# Altium PCB LedMatrixDisplay.PCBDOC (part 3 of 3)
Units mm, origin at the board's own origin, x right, y up, seen from the top; angles counter-clockwise.
Board outline 305.05 x 54.1 mm, 4 copper layers (Top Layer, POWER, GROUND, Bottom Layer); 103 components, 165 nets, 805 pads, 317 vias.
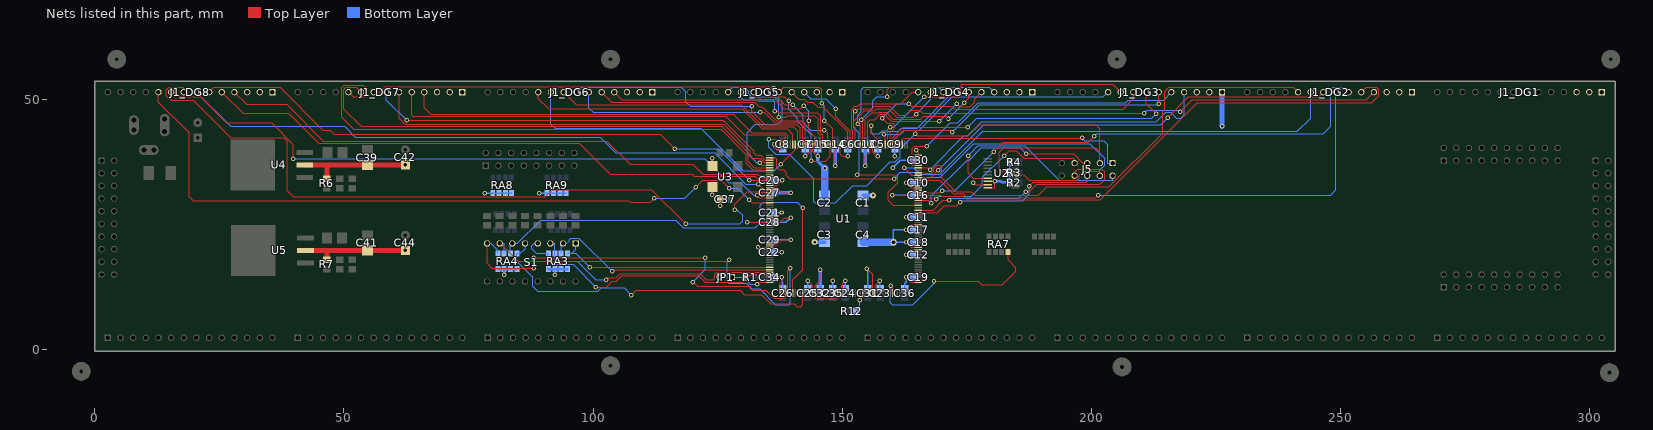
[diagram p5: the nets of this part, all layers, seen from the top]

## Via types
v1: diameter 0.9, hole 0.5, Top Layer to Bottom Layer, 307 vias
v2: diameter 1.2, hole 0.5, Top Layer to Bottom Layer, 9 vias
v3: diameter 1.27, hole 0.711, Top Layer to Bottom Layer, 1 vias

## Nets (pads, with @x,y where several pads share a name; then routed paths per layer and width w, separated by ;. In a path a pad name is that pad's centre, name@x,y a point inside that pad or via, vN(x,y) a via of type N, cw(c..) or ccw(c..) an arc to the next point about the centre after c; other vN are vias at no path point) (continued)
ROWB0: J1_DG2.4 U1.136 | length 141.5
  Top Layer w0.2: v1(152.629,47.752) 153.162,48.285 156.058,48.285 156.464,48.692 159.563,48.692 161.29,46.965 162.879,46.965 163.806,47.892 165.558,47.892 166.104,47.346 v1(210.566,47.346) ; v1(153.035,35.001) 160.757,35.001 161.163,34.595 161.163,33.35 159.258,31.445 159.258,29.863 160.198,28.923 U1.136@165.227,28.923 ; v1(217.805,47.6) 220.218,50.013 255.118,50.013 J1_DG2.4@256.667,51.562
  Bottom Layer w0.2: v1(152.629,47.752) 152.324,47.447 152.324,44.475 153.442,43.358 153.442,35.408 v1(153.035,35.001) ; v1(210.566,47.346) 211.201,47.981 217.424,47.981 v1(217.805,47.6)
ROWB1: J1_DG2.5 U1.140 | length 106.7
  Top Layer w0.2: U1.140@165.227,30.923 169.647,30.923 169.913,30.658 174.244,30.658 174.956,29.947 201.753,29.947 221.26,49.454 256.21,49.454 257.607,50.851 257.607,52.07 257.15,52.527 255.093,52.527 J1_DG2.5@254.127,51.562
ROWB2: J1_DG2.6 U1.141 | length 99.8
  Top Layer w0.2: U1.141@165.227,31.423 169.625,31.423 v1(170.028,31.826) ; v1(180.366,39.624) 182.245,41.504 199.365,41.504 v1(200.533,42.672)
  Bottom Layer w0.2: v1(170.028,31.826) 172.568,31.826 v1(180.366,39.624) ; v1(200.533,42.672) 201.041,43.18 246.482,43.18 248.031,44.729 248.031,52.07 248.463,52.502 250.648,52.502 J1_DG2.6@251.587,51.562
ROWB3: J1_DG2.7 U1.146 | length 105.5
  Top Layer w0.2: U1.146@165.227,33.923 169.545,33.923 172.252,31.217 174.27,31.217 175.083,30.404 200.838,30.404 v1(201.321,30.886)
  Bottom Layer w0.2: v1(201.321,30.886) 247.981,30.886 249.047,31.953 J1_DG2.7@249.047,51.562
ROWB4: J1_DG2.8 U1.147 | length 88.4
  Top Layer w0.2: U1.147@165.227,34.423 167.774,34.423 v1(169.241,35.89) ; v1(215.265,46.457) 219.431,50.622 245.568,50.622 J1_DG2.8@246.507,51.562
  Bottom Layer w0.2: v1(169.241,35.89) 178.385,45.034 213.843,45.034 v1(215.265,46.457)
ROWB5: J1_DG2.9 U1.148 | length 95.4
  Top Layer w0.2: v1(162.433,36.449) 163.959,34.923 U1.148@165.227,34.923
  Bottom Layer w0.2: v1(162.433,36.449) 164.338,36.449 165.735,35.052 169.545,35.052 178.181,43.688 241.3,43.688 243.967,46.355 J1_DG2.9@243.967,51.562
ROWB6: J1_DG2.10 U1.149 | length 94.9
  Top Layer w0.2: U1.149@165.227,35.423 166.675,35.423 166.843,35.255 167.92,35.255 168.377,35.712 168.377,36.22 169.012,36.855 169.545,36.855 170.003,36.398 170.003,34.366 172.746,31.623 175.895,31.623 176.683,30.836 189.307,30.836 191.059,32.588 203.505,32.588 214.249,43.332 214.249,47.752 214.681,48.184 214.681,51.664 215.545,52.527 240.462,52.527 J1_DG2.10@241.427,51.562
ROWC0: J1_DG4.4 U1.169 | length 35.1
  Top Layer w0.2: v1(155.829,44.856) 155.829,43.346 157.077,42.098 U1.169@157.077,41.073
  Bottom Layer w0.2: v1(155.829,44.856) 155.829,43.536 156.109,43.256 157.404,43.256 157.988,43.84 158.801,43.84 158.877,43.764 161.265,43.764 161.875,44.374 164.999,44.374 171.908,51.283 171.908,52.07 172.339,52.502 179.528,52.502 J1_DG4.4@180.467,51.562
ROWC1: J1_DG4.5 U1.173 | length 31.8
  Top Layer w0.2: U1.173@155.077,41.073 155.077,45.568 155.585,46.076 156.553,46.076 157.569,47.092 158.459,47.092 159.805,45.745 v1(169.469,45.745) ; v1(172.974,49.251) 173.584,48.641 175.641,48.641 176.53,49.53 176.53,50.165 J1_DG4.5@177.927,51.562
  Bottom Layer w0.2: v1(169.469,45.745) v1(172.974,49.251)
ROWC2: J1_DG4.6 U1.174 | length 30.3
  Top Layer w0.2: U1.174@154.577,41.073 154.577,45.306 154.661,45.39 154.661,46.203 155.931,47.473 157.252,47.473 157.277,47.498 158.801,47.498 160.147,46.152 165.735,46.152 166.269,46.685 170.866,46.685 v1(171.311,46.241) ; v1(174.473,49.403) 175.387,50.317 J1_DG4.6@175.387,51.562
  Bottom Layer w0.2: v1(171.311,46.241) v1(174.473,49.403)
ROWC3: J1_DG4.7 U1.175 | length 28.8
  Top Layer w0.2: v1(153.848,46.05) 154.077,45.821 U1.175@154.077,41.073 ; v1(159.055,50.622) 159.055,52.07 159.487,52.502 171.908,52.502 J1_DG4.7@172.847,51.562
  Bottom Layer w0.2: v1(153.848,46.05) 156.134,48.336 156.134,49.809 156.947,50.622 v1(159.055,50.622)
ROWC4: J1_DG4.8 U1.176 | length 28.5
  Top Layer w0.2: v1(153.086,45.237) 153.577,44.746 U1.176@153.577,41.073
  Bottom Layer w0.2: v1(153.086,45.237) 153.086,46.965 153.848,47.727 153.848,52.07 154.28,52.502 169.368,52.502 J1_DG4.8@170.307,51.562
ROWC5: J1_DG4.9 U1.178 | length 24.9
  Top Layer w0.2: U1.178@152.577,41.073 152.577,44.475 152.324,44.729 152.324,45.745 154.458,47.879 156.464,47.879 156.871,48.285 159.183,48.285 160.91,46.558 164.211,46.558 v1(164.796,47.142)
  Bottom Layer w0.2: v1(164.796,47.142) 167.767,50.114 J1_DG4.9@167.767,51.562
ROWC6: J1_DG4.10 U1.179 | length 21.9
  Top Layer w0.2: U1.179@152.077,41.073 152.077,43.935 151.867,44.145 151.867,48.082 152.477,48.692 153.112,48.692 153.645,49.225 161.748,49.225 164.084,51.562 J1_DG4.10@165.227,51.562
ROWD0: J1_DG6.4 U1.194 | length 48.3
  Top Layer w0.2: J1_DG6.4@104.267,51.562 105.791,50.038 132.792,50.038 133.122,49.708 136.83,49.708 138.303,48.235 141.682,48.235 v1(142.24,48.793) ; v1(143.256,45.847) 143.256,43.815 144.577,42.494 U1.194@144.577,41.073
  Bottom Layer w0.2: v1(142.24,48.793) 143.256,47.778 v1(143.256,45.847)
ROWD1: J1_DG6.5 U1.198 | length 47.6
  Top Layer w0.2: J1_DG6.5@101.727,51.562 103.709,49.581 132.461,49.581 133.376,48.666 133.935,48.666 136.793,45.808 141.898,45.808 142.577,45.129 U1.198@142.577,41.073
ROWD2: J1_DG6.6 U1.199 | length 51.3
  Top Layer w0.2: v1(133.579,47.498) 134.385,47.498 136.475,45.408 141.478,45.408 142.077,44.809 U1.199@142.077,41.073
  Bottom Layer w0.2: J1_DG6.6@99.187,51.562 99.187,48.362 100.051,47.498 v1(133.579,47.498)
ROWD3: J1_DG6.7 U1.200 | length 53.7
  Top Layer w0.2: v1(131.826,48.692) 131.826,47.727 134.545,45.008 140.996,45.008 140.996,45.002 141.577,44.42 U1.200@141.577,41.073
  Bottom Layer w0.2: J1_DG6.7@96.647,51.562 97.587,52.502 117.729,52.502 118.568,51.664 118.568,49.682 119.558,48.692 v1(131.826,48.692)
ROWD4: J1_DG6.8 U1.201 | length 52.9
  Top Layer w0.2: J1_DG6.8@94.107,51.562 96.622,49.047 129.693,49.047 134.132,44.608 140.177,44.608 141.077,43.708 U1.201@141.077,41.073
ROWD5: J1_DG6.9 U1.202 | length 62.1
  Top Layer w0.2: v1(137.668,37.084) 139.964,39.38 139.964,39.391 140.577,40.005 U1.202@140.577,41.073
  Bottom Layer w0.2: J1_DG6.9@91.567,51.562 91.567,45.161 92.406,44.323 121.565,44.323 130.099,35.789 136.373,35.789 v1(137.668,37.084)
ROWD6: J1_DG6.10 U1.203 | length 57.3
  Top Layer w0.2: J1_DG6.10@89.027,51.562 89.027,50.292 91.11,48.209 129.965,48.209 133.966,44.208 138.922,44.208 140.077,43.053 U1.203@140.077,41.073
ROWE0: J1_DG3.4 U1.151 | length 63.6
  Top Layer w0.2: U1.151@165.227,36.423 167.209,36.423 v1(167.615,36.017)
  Bottom Layer w0.2: v1(167.615,36.017) 174.371,42.774 175.21,42.774 178.029,45.593 212.979,45.593 214.884,47.498 215.9,47.498 217.043,46.355 217.932,46.355 218.567,46.99 J1_DG3.4@218.567,51.562
ROWE1: J1_DG3.5 U1.152 | length 61.1
  Top Layer w0.2: U1.152@165.227,36.923 164.084,36.923 164.084,40.284 164.516,40.716 v1(166.955,40.716)
  Bottom Layer w0.2: v1(166.955,40.716) 171.628,45.39 173.203,45.39 177.242,49.428 206.858,49.428 207.417,49.987 214.453,49.987 J1_DG3.5@216.027,51.562
ROWE2: J1_DG3.6 U1.162 | length 59.6
  Top Layer w0.2: U1.162@160.577,41.073 160.577,42.188 162.357,43.967 171.679,43.967 v1(172.111,43.536) ; v1(213.487,49.225) J1_DG3.6@213.487,51.562
  Bottom Layer w0.2: v1(172.111,43.536) 177.597,49.022 213.284,49.022 v1(213.487,49.225)
ROWE3: J1_DG3.7 U1.163 | length 61.3
  Top Layer w0.2: U1.163@160.077,41.073 160.077,42.297 162.281,44.501 v1(175.133,44.501) ; J1_DG3.7@210.947,51.562 210.947,49.251 v1(212.979,47.219)
  Bottom Layer w0.2: v1(175.133,44.501) 176.988,46.355 212.116,46.355 v1(212.979,47.219)
ROWE4: J1_DG3.8 U1.164 | length 61.6
  Top Layer w0.2: v1(158.014,46.33) 159.004,45.339 160.212,45.339 160.401,45.149 160.401,44.258 159.577,43.434 U1.164@159.577,41.073 ; v1(163.322,49.276) 163.906,48.692 171.983,48.692 172.517,48.158 206.325,48.158 208.407,50.241 J1_DG3.8@208.407,51.562
  Bottom Layer w0.2: v1(158.014,46.33) 160.96,49.276 v1(163.322,49.276)
ROWE5: J1_DG3.9 U1.165 | length 55.4
  Top Layer w0.2: U1.165@159.077,41.073 159.077,42.262 159.131,42.316 159.131,44.094 v1(159.589,44.552) ; v1(166.447,50.622) 173.584,50.622 173.889,50.927 173.889,52.883 174.194,53.188 204.242,53.188 J1_DG3.9@205.867,51.562
  Bottom Layer w0.2: v1(159.589,44.552) 160.376,44.552 v1(166.447,50.622)
ROWE6: J1_DG3.10 U1.166 | length 50.6
  Top Layer w0.2: v1(158.369,43.078) 158.577,42.87 U1.166@158.577,41.073
  Bottom Layer w0.2: v1(158.369,43.078) 161.621,43.078 162.51,43.967 165.405,43.967 172.035,50.597 202.362,50.597 J1_DG3.10@203.327,51.562
ROWF0: J1_DG8.4 U1.9 | length 114.3
  Top Layer w0.2: J1_DG8.4@28.067,51.562 30.506,49.124 38.532,49.124 45.924,41.732 102.769,41.732 107.442,37.059 120.041,37.059 121.997,35.103 132.995,35.103 133.174,34.923 U1.9@135.427,34.923
ROWF1: J1_DG8.5 U1.10 | length 117
  Top Layer w0.2: J1_DG8.5@25.527,51.562 29.795,47.295 38.964,47.295 44.984,41.275 97.206,41.275 103.429,35.052 119.965,35.052 120.32,34.696 132.512,34.696 132.785,34.423 U1.10@135.427,34.423
ROWF2: J1_DG8.6 U1.11 | length 120.5
  Top Layer w0.2: J1_DG8.6@22.987,51.562 23.927,52.502 37.211,52.502 45.746,43.967 47.168,43.967 48.057,43.078 113.488,43.078 v1(116.383,40.183) ; v1(131.344,33.934) 131.355,33.923 U1.11@135.427,33.923
  Bottom Layer w0.2: v1(116.383,40.183) 125.095,40.183 v1(131.344,33.934)
ROWF3: J1_DG8.7 U1.15 | length 123.1
  Top Layer w0.2: v1(133.147,33.096) 134.32,31.923 U1.15@135.427,31.923
  Bottom Layer w0.2: J1_DG8.7@20.447,51.562 27.305,44.704 50.165,44.704 52.324,42.545 101.429,42.545 104.579,39.395 124.384,39.395 130.683,33.096 v1(133.147,33.096)
ROWF4: J1_DG8.8 U1.16 | length 151.7
  Top Layer w0.2: J1_DG8.8@17.907,51.562 17.907,52.273 17.653,52.527 14.885,52.527 14.428,52.07 14.428,50.851 15.367,49.911 19.787,49.911 27.28,42.418 37.966,42.418 38.634,41.751 38.634,31.826 39.904,30.556 90.45,30.556 91.923,32.029 111.71,32.029 v1(118.618,25.121) ; v1(128.397,27.991) 128.397,29.083 130.912,31.598 133.633,31.598 133.808,31.423 U1.16@135.427,31.423
  Bottom Layer w0.2: v1(118.618,25.121) 129.464,25.121 129.998,25.654 129.998,26.873 128.88,27.991 v1(128.397,27.991)
ROWF5: J1_DG8.9 U1.18 | length 130.5
  Top Layer w0.2: J1_DG8.9@15.367,51.562 16.18,51.562 17.145,50.597 21.311,50.597 26.467,45.441 35.51,45.441 39.904,41.046 v1(39.904,38.227) ; v1(132.969,30.836) 133.382,30.423 U1.18@135.427,30.423
  Bottom Layer w0.2: v1(39.904,38.227) 122.428,38.227 127.229,33.426 129.667,33.426 132.258,30.836 v1(132.969,30.836)
ROWF6: J1_DG8.10 U1.20 | length 144.1
  Top Layer w0.2: J1_DG8.10@12.827,51.562 12.827,49.581 18.974,43.434 18.974,30.556 19.787,29.743 107.214,29.743 107.519,29.439 111.456,29.439 v1(112.294,30.277) ; v1(120.65,32.537) 121.971,33.858 125.68,33.858 v1(127.28,32.258) ; v1(131.318,29.997) 131.892,29.423 U1.20@135.427,29.423
  Bottom Layer w0.2: v1(112.294,30.277) 118.39,30.277 v1(120.65,32.537) ; v1(127.28,32.258) 129.058,32.258 v1(131.318,29.997)
ROWG0: J1_DG7.4 U1.205 | length 80.1
  Top Layer w0.2: J1_DG7.4@66.167,51.562 66.167,48.412 67.437,47.142 128.143,47.142 131.877,43.408 138.456,43.408 139.077,42.787 U1.205@139.077,41.073
ROWG1: J1_DG7.5 U1.206 | length 82.9
  Top Layer w0.2: J1_DG7.5@63.627,51.562 63.627,46.965 63.856,46.736 126.645,46.736 130.379,43.002 138.253,43.002 138.577,42.677 U1.206@138.577,41.073
ROWG2: J1_DG7.6 U1.4 | length 83.8
  Top Layer w0.2: J1_DG7.6@61.087,51.562 61.087,46.33 62.332,45.085 126.238,45.085 131.572,39.751 131.572,38.862 132.08,38.354 133.503,38.354 134.433,37.423 U1.4@135.427,37.423
ROWG3: J1_DG7.7 U1.3 | length 83.7
  Top Layer w0.2: v1(62.611,45.923) 126.111,45.923 132.207,39.827 132.207,39.37 132.715,38.862 133.604,38.862 134.366,38.1 134.353,38.088 134.518,37.923 U1.3@135.427,37.923
  Bottom Layer w0.2: J1_DG7.7@58.547,51.562 58.547,49.987 v1(62.611,45.923)
ROWG4: J1_DG7.8 U1.5 | length 105.6
  Top Layer w0.2: J1_DG7.8@56.007,51.562 57.176,51.562 58.268,52.654 135.89,52.654 v1(136.221,52.324) ; v1(133.401,37.389) 133.867,36.923 U1.5@135.427,36.923
  Bottom Layer w0.2: v1(133.401,37.389) 132.822,37.389 130.937,39.274 130.937,43.434 132.588,45.085 137.11,45.085 137.999,45.974 137.999,49.528 136.221,51.306 v1(136.221,52.324)
ROWG5: J1_DG7.9 U1.6 | length 99.3
  Top Layer w0.2: J1_DG7.9@53.467,51.562 52.528,52.502 50.419,52.502 49.988,52.07 49.988,48.158 53.467,44.679 125.857,44.679 131.153,39.382 131.153,37.63 132.36,36.423 U1.6@135.427,36.423
ROWG6: J1_DG7.10 U1.7 | length 108
  Top Layer w0.2: J1_DG7.10@50.927,51.562 51.867,50.622 54.179,50.622 54.407,50.851 54.407,52.476 53.925,52.959 50.064,52.959 49.581,52.476 49.581,46.558 52.045,44.094 125.68,44.094 130.753,39.021 130.753,37.268 132.004,36.017 133.782,36.017 133.876,35.923 U1.7@135.427,35.923
ROWH0: J1_DG5.4 U1.180 | length 16.1
  Top Layer w0.2: v1(148.667,48.285) 148.667,46.659 151.577,43.749 U1.180@151.577,41.073
  Bottom Layer w0.2: J1_DG5.4@142.367,51.562 143.714,50.216 146.736,50.216 v1(148.667,48.285)
ROWH1: J1_DG5.5 U1.181 | length 17.1
  Top Layer w0.2: J1_DG5.5@139.827,51.562 141.224,50.165 142.392,50.165 143.002,49.555 144.12,49.555 145.161,48.514 146.177,48.514 151.077,43.614 U1.181@151.077,41.073
ROWH2: J1_DG5.6 U1.187 | length 21
  Top Layer w0.2: J1_DG5.6@137.287,51.562 138.227,52.502 145.415,52.502 145.847,52.07 v1(145.847,49.352) ; v1(146.431,45.847) 148.077,44.201 U1.187@148.077,41.073
  Bottom Layer w0.2: v1(145.847,49.352) 146.431,48.768 v1(146.431,45.847)
ROWH3: J1_DG5.7 U1.188 | length 25.8
  Top Layer w0.2: J1_DG5.7@134.747,51.562 135.687,50.622 138.405,50.622 v1(139.218,49.809) ; v1(143.764,37.795) 143.714,37.744 146.663,37.744 147.577,38.659 U1.188@147.577,41.073
  Bottom Layer w0.2: v1(139.218,49.809) 139.218,48.133 140.996,46.355 140.996,45.821 143.764,43.053 v1(143.764,37.795)
ROWH4: J1_DG5.8 U1.189 | length 21.4
  Top Layer w0.2: J1_DG5.8@132.207,51.562 133.655,50.114 137.338,50.114 138.456,48.997 v1(140.031,48.997) ; v1(146.431,43.942) 147.077,43.296 U1.189@147.077,41.073
  Bottom Layer w0.2: v1(140.031,48.997) 142.19,46.838 142.19,45.389 143.637,43.942 v1(146.431,43.942)
ROWH5: J1_DG5.9 U1.191 | length 25.6
  Top Layer w0.2: v1(136.424,47.727) 137.058,47.727 137.363,47.422 144.983,47.422 145.677,46.728 145.677,43.426 146.077,43.026 U1.191@146.077,41.073
  Bottom Layer w0.2: J1_DG5.9@129.667,51.562 129.667,50.546 130.125,50.089 136.017,50.089 136.424,49.682 v1(136.424,47.727)
ROWH6: J1_DG5.10 U1.192 | length 28.8
  Top Layer w0.2: v1(137.237,46.558) 138.684,46.558 138.989,46.863 144.526,46.863 145.161,46.228 145.161,43.307 145.577,42.891 U1.192@145.577,41.073
  Bottom Layer w0.2: J1_DG5.10@127.127,51.562 128.067,52.502 130.429,52.502 131.268,51.664 131.268,51.105 131.75,50.622 136.339,50.622 137.237,49.725 v1(137.237,46.558)
SPARTAN_M0: JP1.1 R1.2 U1.52 | length 8.9
  Top Layer w0.2: v1(132.919,13.005) 132.943,13.005 133.362,13.423 U1.52@135.427,13.423
  Bottom Layer w0.2: JP1.1@127.889,14.478 128.575,14.478 128.63,14.423 R1.2@130.545,14.423 131.115,14.423 131.115,13.462 131.572,13.005 v1(132.919,13.005)
SW0: RA3.4 S1.1 U1.46 | length 44
  Top Layer w0.2: v1(99.314,16.434) 99.325,16.423 U1.46@135.427,16.423
  Bottom Layer w0.2: RA3.4@94.869,19.228 95.708,19.228 ; S1.1@96.52,21.209 96.52,20.041 95.708,19.228 ; v1(99.314,16.434) 96.52,19.228 95.708,19.228
SW1: RA3.3 S1.2 U1.47 | length 47.3
  Top Layer w0.2: v1(103.81,15.672) 104.062,15.923 U1.47@135.427,15.923
  Bottom Layer w0.2: RA3.3@93.599,19.228 93.599,21.209 S1.2@93.98,21.209 94.768,21.209 95.25,21.692 95.25,21.996 95.555,22.301 97.181,22.301 v1(103.81,15.672)
SW2: RA3.2 S1.3 U1.48 | length 50.7
  Top Layer w0.2: v1(102.616,13.945) 102.997,14.326 104.68,14.326 105.449,15.094 121.558,15.094 122.682,13.97 124.079,13.97 124.41,14.3 124.41,14.986 124.847,15.423 U1.48@135.427,15.423
  Bottom Layer w0.2: S1.3@91.44,21.209 92.126,21.209 92.329,21.006 RA3.2@92.329,19.228 92.329,18.059 92.736,17.653 96.8,17.653 100.508,13.945 v1(102.616,13.945)
SW3: RA3.1 S1.4 U1.49 | length 55.7
  Top Layer w0.2: v1(100.534,12.471) 102.693,12.471 103.836,13.614 104.648,13.614 105.728,14.694 121.196,14.694 122.479,13.411 130.125,13.411 131.637,14.923 U1.49@135.427,14.923
  Bottom Layer w0.2: S1.4@88.9,21.209 88.164,21.209 87.732,20.777 87.732,20.142 88.646,19.228 RA3.1@91.059,19.228 91.059,17.856 91.923,16.993 96.012,16.993 v1(100.534,12.471)
SW4: RA4.4 S1.5 U1.62 | length 70.7
  Top Layer w0.2: v1(107.696,10.846) 108.636,11.786 129.565,11.786 130.378,10.973 133.757,10.973 135.636,9.093 140.335,9.093 140.894,8.534 141.656,8.534 142.113,8.992 142.113,9.957 142.077,9.993 U1.62@142.077,11.273
  Bottom Layer w0.2: S1.5@86.36,21.209 86.36,20.168 85.421,19.228 RA4.4@84.709,19.228 84.709,17.653 87.91,14.453 87.91,12.649 88.9,11.659 100.965,11.659 101.625,12.319 106.223,12.319 v1(107.696,10.846)
SW5: RA4.3 S1.6 U1.58 | length 85.9
  Top Layer w0.2: U1.58@140.077,11.273 140.077,13.89 142.088,15.9 v1(142.088,28.397)
  Bottom Layer w0.2: RA4.3@83.439,19.228 83.439,21.209 S1.6@83.82,21.209 84.836,21.209 89.535,25.908 116.586,25.908 118.136,24.359 132.563,24.359 133.503,25.298 133.503,28.905 134.112,29.515 140.97,29.515 v1(142.088,28.397)
SW6: RA4.2 S1.7 U1.56 | length 82.1
  Top Layer w0.2: S1.7@81.28,21.209 81.814,21.209 81.814,20.828 85.014,17.628 127.026,17.628 v1(127.331,17.932) ; U1.56@139.077,11.273 139.077,15.735 v1(139.599,16.256)
  Bottom Layer w0.2: S1.7@81.28,21.209 81.966,21.209 82.169,21.006 RA4.2@82.169,19.228 ; v1(127.331,17.932) 126.95,17.551 126.95,13.462 127.178,13.233 130.709,13.233 131.827,12.115 133.427,12.115 136.601,8.941 139.345,8.941 139.599,9.195 v1(139.599,16.256)
SW7: RA4.1 S1.8 U1.55 | length 80.8
  Top Layer w0.2: S1.8@78.74,21.209 78.74,17.196 79.731,16.205 v1(88.138,16.205) ; v1(88.138,18.39) v1(122.555,18.39) ; v1(120.015,13.462) 120.142,13.462 121.006,12.598 131.42,12.598 131.522,12.497 131.522,12.243 131.953,11.811 134.697,11.811 136.322,10.185 138.349,10.185 138.577,10.414 U1.55@138.577,11.273
  Bottom Layer w0.2: S1.8@78.74,21.209 79.528,21.209 80.899,19.837 RA4.1@80.899,19.228 ; v1(88.138,16.205) v1(88.138,18.39) ; v1(120.015,13.462) 122.555,16.002 v1(122.555,18.39)
TCK_HARD: J5.3 U1.207 U2.6 | length 121.9
  Top Layer w0.2: v1(135.255,42.164) 138.077,42.164 U1.207@138.077,41.073 ; v1(164.643,43.18) 164.669,43.18 165.075,42.774 175.286,42.774 177.546,45.034 200.838,45.034 201.677,44.196 201.677,39.547 ; U2.6@184.758,35.627 182.102,35.627 181.509,36.22 181.509,39.472 182.423,40.386 200.838,40.386 201.677,39.547 ; J5.3@201.677,37.338 201.677,39.547
  Bottom Layer w0.2: v1(135.255,42.164) 135.236,42.145 135.236,40.532 136.652,39.116 139.319,39.116 144.272,34.163 144.272,29.591 144.526,29.337 148.616,29.337 152.07,32.791 154.89,32.791 159.665,37.567 160.628,37.567 161.646,38.584 161.646,40.183 v1(164.643,43.18)
TCK_SOFT: J5.7 U1.139 | length 37.9
  Top Layer w0.2: U1.139@165.227,30.423 168.58,30.423 v1(168.885,30.119) ; v1(182.449,38.811) 183.465,39.827 184.887,39.827 186.436,38.278 196.368,38.278 196.597,38.049 J5.7@196.597,37.338
  Bottom Layer w0.2: v1(168.885,30.119) 169.424,30.658 175.87,30.658 178.131,32.918 178.131,34.493 v1(182.449,38.811)
TDI_HARD: J5.1 U1.159 | length 47.6
  Top Layer w0.2: U1.159@162.077,41.073 162.077,42.113 162.331,42.367 198.044,42.367 v1(198.095,42.418)
  Bottom Layer w0.2: v1(198.095,42.418) 198.654,41.859 202.464,41.859 203.302,41.021 203.302,37.338 J5.1@204.217,37.338
TDI_SOFT: J5.5 U1.138 | length 40.9
  Top Layer w0.2: U1.138@165.227,29.923 167.283,29.923 v1(167.894,29.312) ; v1(186.919,39.167) 196.393,39.167 198.222,37.338 J5.5@199.137,37.338
  Bottom Layer w0.2: v1(167.894,29.312) 167.894,30.81 175.032,37.948 175.464,37.948 177.902,40.386 185.7,40.386 v1(186.919,39.167)
TDO_HARD: J5.2 U2.17 | length 41.4
  Top Layer w0.2: v1(175.235,38.811) 175.235,35.408 176.316,34.327 U2.17@179.208,34.327
  Bottom Layer w0.2: v1(175.235,38.811) 177.216,40.792 186.589,40.792 193.523,33.858 204.217,33.858 J5.2@204.217,34.798
TDO_SOFT: J5.6 U1.133 | length 38.5
  Top Layer w0.2: U1.133@165.227,27.423 169.091,27.423 170.471,28.804 173,28.804 v1(173.635,29.439) ; v1(187.554,32.69) 188.316,33.452 198.807,33.452 199.137,33.782 J5.6@199.137,34.798
  Bottom Layer w0.2: v1(173.635,29.439) 173.99,29.794 186.208,29.794 187.554,31.14 v1(187.554,32.69)
TMS_HARD: J5.4 U1.2 U2.5 | length 98.3
  Top Layer w0.2: U1.2@135.427,38.423 136.551,38.423 136.906,38.068 136.906,36.449 137.338,36.017 138.227,36.017 138.811,35.433 138.811,34.925 139.497,34.239 v1(160.401,34.239) ; U2.5@184.758,34.977 186.436,34.977 187.555,33.858 197.181,33.858 197.587,34.265 197.587,34.925 198.4,35.738 201.448,35.738 201.677,35.509 J5.4@201.677,34.798
  Bottom Layer w0.2: v1(160.401,34.239) 161.671,35.509 164.516,35.509 165.481,34.544 169.647,34.544 176.353,41.25 199.644,41.25 202.616,38.278 202.616,36.931 201.677,35.992 J5.4@201.677,34.798
TMS_SOFT: J5.8 U1.134 | length 48.7
  Top Layer w0.2: U1.134@165.227,27.923 168.233,27.923 170.155,29.845 v1(171.501,29.845) ; v1(186.792,31.598) 187.524,31.598 188.972,33.045 201.651,33.045 202.616,34.011 202.616,35.585 202.057,36.144 197.231,36.144 196.597,35.51 J5.8@196.597,34.798
  Bottom Layer w0.2: v1(171.501,29.845) 171.908,30.251 185.446,30.251 v1(186.792,31.598)
VCCINT: C2.1 C4.1 C13.2 C14.2 C15.2 C16.2 C17.2 C18.2 C27.1 C28.1 C29.1 C30.1 C31.1 C32.1 C41.1 C44.1 R7.1 U1.14 U1.28 U1.37 U1.67 U1.76 U1.90 U1.119 U1.128 U1.142 U1.172 U1.186 U1.195 U5.2 | length 142.9
  Top Layer w0.2: v1(130.963,25.451) 131.344,25.451 131.371,25.423 U1.28@135.427,25.423 137.437,25.423 138.43,26.416 v1(139.7,26.416) ; U1.37@135.427,20.923 136.84,20.923 137.84,21.923 v1(139.653,21.923) ; U1.14@135.427,32.423 136.84,32.423 137.84,31.423 v1(139.7,31.423) ; U1.195@144.077,41.073 144.077,39.66 v1(145.077,38.66) ; v1(145.577,15.967) 145.577,13.686 144.577,12.686 U1.67@144.577,11.273 144.577,10.16 149.077,10.16 U1.76@149.077,11.273 ; v1(148.577,36.83) U1.186@148.577,41.073 ; v1(154.577,36.83) 154.577,38.66 155.577,39.66 U1.172@155.577,41.073 ; v1(154.94,16.129) 156.077,14.992 U1.90@156.077,11.273 ; v1(160.02,30.861) 162.687,30.861 163.036,31.21 ; v1(162.814,21.423) 163.814,20.423 U1.119@165.227,20.423 ; v1(162.814,23.923) 163.814,24.923 U1.128@165.227,24.923 ; 162.814,30.923 163.1,31.21 ; 163.068,31.242 163.036,31.21 ; U1.142@165.227,31.923 163.814,31.923 163.1,31.21 ; 163.036,31.21 163.1,31.21
  Top Layer w1: U5.2@42.291,19.812 46.609,19.812 ; R7.1@46.609,17.968 46.609,19.812 ; C44.1@62.357,19.812 C41.1@54.737,19.812 46.609,19.812
  Bottom Layer w0.3: C29.1@136.377,21.923 v1(139.653,21.923) ; C28.1@136.377,25.423 138.684,25.423 139.677,26.416 v1(139.7,26.416) ; C27.1@136.377,31.423 137.84,31.423 ; v1(145.077,38.66) C15.2@145.077,40.123 ; C32.1@145.542,12.192 C32.1@145.577,12.223 ; v1(154.94,16.129) 155.077,15.992 C31.1@155.077,12.223 ; v1(160.02,30.861) 160.082,30.923 C16.2@164.277,30.923 ; v1(160.147,36.449) 161.621,37.923 C30.1@164.277,37.923 ; C18.2@164.277,21.423 v1(162.814,21.423) 160.314,21.423 v3(160.274,21.463) 160.274,23.923 v1(162.814,23.923) C17.2@164.277,23.923
  Bottom Layer w0.5: v1(139.653,21.923) v1@139.7,21.971 ; v1(139.7,26.416) v1@139.827,26.289
  Bottom Layer w0.7: C27.1@136.377,31.423 v1(139.7,31.423) ; v1(145.077,38.66) 145.077,37.676 v1(146.477,36.276) ; C32.1@145.577,12.223 v1(145.577,15.967) ; v1(148.577,36.83) C14.2@148.577,40.123 ; v1(154.577,36.83) C13.2@154.577,40.123
  Bottom Layer w1.5: C2.1@146.477,30.873 v1(146.477,36.276) ; C4.1@154.177,21.473 v3(160.274,21.463)
VCCO: C1.1 C3.1 C5.2 C6.2 C7.2 C8.2 C9.2 C10.2 C11.2 C12.2 C19.1 C20.1 C21.1 C22.1 C23.1 C24.1 C25.1 C26.1 C34.2 C35.2 C36.2 C37.1 C39.1 C42.1 J1_DG1.1 J1_DG1.2 J1_DG1.3 J1_DG2.1 J1_DG2.2 J1_DG2.3 J1_DG3.1 J1_DG3.2 J1_DG3.3 J1_DG4.1 J1_DG4.2 J1_DG4.3 J1_DG5.1 J1_DG5.2 J1_DG5.3 J1_DG6.1 J1_DG6.2 J1_DG6.3 J1_DG7.1 J1_DG7.2 J1_DG7.3 J1_DG8.1 J1_DG8.2 J1_DG8.3 JP1.2 R2.1 R3.1 R4.1 R6.1 RA3.5 RA3.6 RA3.7 RA3.8 RA4.5 RA4.6 RA4.7 RA4.8 RA8.5 RA8.6 RA8.7 RA8.8 RA9.5 RA9.6 RA9.7 RA9.8 U1.13 U1.26 U1.38 U1.53 U1.66 U1.78 U1.91 U1.105 U1.118 U1.130 U1.143 U1.156 U1.171 U1.184 U1.196 U1.208 U2.18 U2.19 U2.20 U3.1 U3.4 U4.2 | length 148.2
  Top Layer w0.2: v1(133.096,20.423) U1.38@135.427,20.423 ; U1.26@135.427,26.423 136.84,26.423 v1(137.84,27.423) ; U1.13@135.427,32.923 136.937,32.923 v1(137.922,33.909) ; v1(136.398,41.148) 136.398,40.513 136.906,40.005 137.577,40.005 U1.208@137.577,41.073 ; U1.53@137.577,11.273 137.577,13.117 137.84,13.38 v1(137.84,14.423) ; v1(142.577,38.66) 143.577,39.66 U1.196@143.577,41.073 ; v1(143.077,13.686) 144.077,12.686 U1.66@144.077,11.273 ; U1.184@149.577,41.073 149.577,39.145 150.062,38.66 v1(151.077,38.66) ; U1.78@150.077,11.273 150.077,13.186 v1(150.577,13.686) ; U1.171@156.077,41.073 156.077,39.66 v1(157.077,38.66) ; U1.91@156.577,11.273 156.577,12.728 v1(157.567,13.718) ; v1(162.814,14.423) 163.814,13.423 U1.105@165.227,13.423 ; v1(162.814,18.923) 163.814,19.923 U1.118@165.227,19.923 ; v1(162.814,26.423) 163.314,25.923 U1.130@165.227,25.923 ; v1(162.814,33.423) 163.814,32.423 U1.143@165.227,32.423 ; v1(164.846,39.878) 165.227,39.497 U1.156@165.227,38.923 ; v1(176.276,33.426) 176.676,33.027 U2.19@179.208,33.027 ; U2.20@179.208,32.377 180.61,32.377 v1(180.61,33.677) U2.18@179.208,33.677
  Top Layer w0.3: v1(123.952,30.954) U3.1@123.952,32.531 ; U3.4@123.952,36.731 v1(123.952,38.308) ; v1(125.542,28.772) C37.1@125.542,30.099
  Top Layer w0.5: R6.1@46.609,34.224 R6.1@46.609,34.417 ; C42.1@62.206,36.957 C42.1@62.23,36.981
  Top Layer w1: U4.2@42.164,36.957 46.609,36.957 ; R6.1@46.609,34.417 46.609,36.957 ; C42.1@62.357,36.957 62.206,36.957 C39.1@54.737,36.957 46.609,36.957
  Bottom Layer w0.254: v1(92.329,14.901) RA3.7@92.329,16.078
  Bottom Layer w0.3: v1(78.283,31.318) RA8.8@79.883,31.318 RA8.7@81.153,31.318 RA8.6@82.423,31.318 RA8.5@83.693,31.318 ; v1(89.205,31.318) RA9.8@90.805,31.318 RA9.7@92.075,31.318 RA9.6@93.345,31.318 RA9.5@94.615,31.318 ; C34.2@136.377,14.423 v1(137.84,14.423) 137.84,13.507 138.077,13.27 C26.1@138.077,12.223 ; C22.1@136.377,19.423 v1(137.84,19.423) ; C21.1@136.377,27.423 v1(137.84,27.423) ; C20.1@136.377,33.923 136.459,33.909 v1(137.922,33.909) ; v1(142.577,38.66) C7.2@142.577,40.123 ; C25.1@143.077,12.223 v1(143.077,13.686) ; C35.2@148.077,12.223 v1(148.077,13.686) ; C24.1@150.577,12.223 v1(150.577,13.686) ; v1(151.077,38.66) C6.2@151.077,40.123 ; v1(157.077,38.66) C5.2@157.077,40.123 ; v1(157.567,13.718) 157.567,12.255 C23.1@157.577,12.223 ; v1(160.577,38.66) C9.2@160.577,40.123 ; C36.2@162.577,12.223 162.577,13.225 162.814,13.462 v1(162.814,14.423) C19.1@164.277,14.423 ; v1(162.814,18.923) C12.2@164.277,18.923 ; v1(162.814,26.423) C11.2@164.277,26.423 ; v1(162.814,33.423) C10.2@164.277,33.423 ; R2.1@183.581,33.401 R3.1@183.581,35.433 R4.1@183.581,37.465
  Bottom Layer w0.5: RA4.8@80.899,16.078 RA4.7@82.169,16.078 ; v1(82.169,14.901) RA4.7@82.169,16.078 ; RA4.5@84.709,16.078 RA4.6@83.439,16.078 RA4.7@82.169,16.078 ; RA3.8@91.059,16.078 RA3.7@92.329,16.078 RA3.6@93.599,16.078 RA3.5@94.869,16.078 ; v1(136.398,41.148) 136.398,40.64 136.915,40.123 C8.2@138.077,40.123 ; v1(180.61,33.677) 181.842,33.677 181.991,33.528 183.454,33.528 R2.1@183.581,33.401
  Bottom Layer w0.7: v2(144.444,21.473) C3.1@146.477,21.473 ; C1.1@154.177,30.873 v2(156.21,30.873)
  Bottom Layer w1: v1(226.187,44.704) J1_DG3.1@226.187,51.562
WR: RA7.8 U1.98 | length 38.7
  Top Layer w0.2: v1(159.741,12.776) 160.077,12.44 U1.98@160.077,11.273 ; v1(168.402,13.614) 177.267,13.614 177.978,12.903 182.118,12.903 184.811,15.596 184.811,16.383 183.262,17.932 RA7.8@183.262,19.507
  Bottom Layer w0.2: v1(159.741,12.776) 159.639,12.675 159.639,9.271 160.02,8.89 164.186,8.89 168.402,13.106 v1(168.402,13.614)
WR_REG: R12.1 U1.86 | length 4.5
  Top Layer w0.2: v1(153.493,9.83) 154.077,10.415 U1.86@154.077,11.273
  Bottom Layer w0.2: R12.1@152.842,7.62 153.493,7.62 v1(153.493,9.83)
pads on no net: J2_DG1.6 J2_DG2.6 J2_DG3.6 J2_DG4.6 J2_DG5.6 J2_DG6.6 J2_DG7.6 J2_DG8.6 U1.64 U1.69 U1.70 U1.71 U1.73 U1.74 U1.75 U1.77 U1.80 U1.81 U1.82 U1.83 U1.84 U1.87 U1.88 U1.89 U1.93 U1.94 U1.95 U1.182 U2.2 U2.9 U2.12 U2.13 U2.14 U2.15 U2.16 U4.4 U5.4
copper on no net: | length 717.3
  Bottom Layer w0.254: 0.127,-0.254 304.927,-0.254 304.927,53.594 0.127,53.594 0.127,-0.254

## Polygon pours and split planes (outlines as drawn)
6V on POWER (split plane): 28.93,50.038 28.935,49.998 28.95,49.961 28.975,49.929 29.006,49.905 29.044,49.89 29.083,49.884 37.211,49.884 37.251,49.89 37.288,49.905 37.32,49.929 37.344,49.961 37.36,49.998 37.365,50.038 37.365,52.424 67.03,52.424 67.03,50.038 67.035,49.998 67.05,49.961 67.075,49.929 67.106,49.905 67.144,49.89 67.183,49.884 75.311,49.884 75.351,49.89 75.388,49.905 75.42,49.929 75.444,49.961 75.46,49.998 75.465,50.038 75.465,52.424 105.13,52.424 105.13,50.038 105.135,49.998 105.15,49.961 105.175,49.929 105.206,49.905 105.244,49.89 105.283,49.884 113.411,49.884 113.451,49.89 113.488,49.905 113.52,49.929 113.544,49.961 113.56,49.998 113.565,50.038 113.565,52.424 143.23,52.424 143.23,50.038 143.235,49.998 143.25,49.961 143.275,49.929 143.306,49.905 143.344,49.89 143.383,49.884 151.511,49.884 151.551,49.89 151.588,49.905 151.62,49.929 151.644,49.961 151.66,49.998 151.665,50.038 151.665,52.424 181.33,52.424 181.33,50.038 181.335,49.998 181.35,49.961 181.375,49.929 181.406,49.905 181.444,49.89 181.483,49.884 189.611,49.884 189.651,49.89 189.688,49.905 189.72,49.929 189.744,49.961 189.76,49.998 189.765,50.038 189.765,52.424 219.43,52.424 219.43,50.038 219.435,49.998 219.45,49.961 219.475,49.929 219.506,49.905 219.544,49.89 219.583,49.884 227.711,49.884 227.751,49.89 227.788,49.905 227.82,49.929 227.844,49.961 227.86,49.998 227.865,50.038 227.865,52.424 257.53,52.424 257.53,50.038 257.535,49.998 257.55,49.961 257.575,49.929 257.606,49.905 257.644,49.89 257.683,49.884 265.557,49.884 265.597,49.89 265.634,49.905 265.666,49.929 265.69,49.961 265.706,49.998 265.711,50.038 265.711,52.424 295.63,52.424 295.63,49.784 295.635,49.744 295.65,49.707 295.675,49.675 295.706,49.651 295.744,49.636 295.783,49.63 304.544,49.63 304.544,0.129 0.51,0.129 0.51,53.211 28.93,53.211
VCCO on POWER (split plane): 254.1,9.298 50.954,9.298 50.954,45.566 254.101,45.566
VCCINT on POWER (split plane): 161.034,36.776 161.034,17.199 159.077,15.242 140.389,15.242 139.919,15.713 139.877,15.741 139.827,15.75 137.414,15.75 137.364,15.741 137.322,15.713 136.852,15.242 129.721,15.242 128.743,16.22 128.235,16.729 128.193,16.757 128.143,16.766 61.776,16.766 60.479,18.063 60.479,21.436 69.44,21.436 70.901,19.974 70.943,19.946 70.993,19.937 130.883,19.937 132.566,18.254 132.567,18.248 132.582,18.211 132.607,18.179 132.638,18.155 132.676,18.14 132.715,18.134 138.811,18.134 138.851,18.14 138.888,18.155 138.92,18.179 138.944,18.211 138.959,18.248 138.965,18.288 138.959,18.328 138.944,18.365 138.94,18.37 138.94,32.764 140.789,32.764 143.127,30.426 143.127,30.099 143.127,20.828 143.136,20.778 143.164,20.736 144.434,19.466 144.476,19.438 144.526,19.429 156.337,19.429 156.387,19.438 156.429,19.466 157.572,20.609 157.6,20.651 157.609,20.701 157.609,32.512 157.6,32.562 157.572,32.604 155.921,34.255 155.879,34.283 155.829,34.292 146.739,34.292 145.417,35.614 145.417,37.336 160.474,37.336
VCCO on POWER (split plane): 304.544,49.938 295.937,49.938 295.937,52.578 295.932,52.618 295.916,52.655 295.892,52.687 295.86,52.711 295.823,52.726 295.783,52.732 265.557,52.732 265.518,52.726 265.48,52.711 265.449,52.687 265.424,52.655 265.409,52.618 265.404,52.578 265.404,50.192 257.837,50.192 257.837,52.578 257.832,52.618 257.816,52.655 257.792,52.687 257.76,52.711 257.723,52.726 257.683,52.732 227.711,52.732 227.672,52.726 227.634,52.711 227.603,52.687 227.578,52.655 227.563,52.618 227.558,52.578 227.558,50.192 219.737,50.192 219.737,52.578 219.732,52.618 219.716,52.655 219.692,52.687 219.66,52.711 219.623,52.726 219.583,52.732 189.611,52.732 189.572,52.726 189.534,52.711 189.503,52.687 189.478,52.655 189.463,52.618 189.458,52.578 189.458,50.192 181.637,50.192 181.637,52.578 181.632,52.618 181.616,52.655 181.592,52.687 181.56,52.711 181.523,52.726 181.483,52.732 151.511,52.732 151.472,52.726 151.434,52.711 151.403,52.687 151.378,52.655 151.363,52.618 151.358,52.578 151.358,50.192 143.537,50.192 143.537,52.578 143.532,52.618 143.516,52.655 143.492,52.687 143.46,52.711 143.423,52.726 143.383,52.732 113.411,52.732 113.372,52.726 113.334,52.711 113.303,52.687 113.278,52.655 113.263,52.618 113.258,52.578 113.258,50.192 105.437,50.192 105.437,52.578 105.432,52.618 105.416,52.655 105.392,52.687 105.36,52.711 105.323,52.726 105.283,52.732 75.311,52.732 75.272,52.726 75.234,52.711 75.203,52.687 75.178,52.655 75.163,52.618 75.158,52.578 75.158,50.192 67.337,50.192 67.337,52.578 67.332,52.618 67.316,52.655 67.292,52.687 67.26,52.711 67.223,52.726 67.183,52.732 37.211,52.732 37.172,52.726 37.134,52.711 37.103,52.687 37.078,52.655 37.063,52.618 37.058,52.578 37.058,50.192 29.237,50.192 29.237,53.211 304.544,53.211
GND on GROUND (split plane): 304.544,0.129 0.51,0.129 0.51,53.211 304.544,53.211

## Other copper
Top Layer:
  text "1" at 136.017,39.497 h1 r90
POWER (plane layer: these items are gaps in the copper):
  lines w0.254: 60.325,18.034 61.722,16.637 128.143,16.637 128.651,16.129 129.667,15.113 136.906,15.113 137.414,15.621 139.827,15.621 140.335,15.113 144.272,15.113 ; 69.215,21.59 69.469,21.59 70.993,20.066 130.937,20.066 132.715,18.288 133.477,18.288 ; 138.811,18.288 138.811,32.893 140.843,32.893 143.256,30.48 143.256,30.099 143.256,20.828 144.526,19.558 156.337,19.558 157.48,20.701 157.48,32.512 155.829,34.163 146.685,34.163 145.288,35.56 145.288,37.465 160.528,37.465 161.163,36.83 161.163,17.145 159.131,15.113 143.764,15.113
  lines w0.305: 29.083,53.721 29.083,50.038 37.211,50.038 37.211,52.578 67.183,52.578 ; 60.325,18.034 60.325,21.59 ; 60.579,21.59 60.325,21.59 ; 69.469,21.59 60.325,21.59 ; 132.715,18.288 138.811,18.288 ; 305.055,49.784 295.783,49.784 295.783,52.578 265.557,52.578 265.557,50.038 257.683,50.038 257.683,52.578 227.711,52.578 227.711,50.038 219.583,50.038 219.583,52.578 189.611,52.578 189.611,50.038 181.483,50.038 181.483,52.578 151.511,52.578 151.511,50.038 143.383,50.038 143.383,52.578 113.411,52.578 113.411,50.038 105.283,50.038 105.283,52.578 75.311,52.578 75.311,50.038 67.183,50.038 ; 67.183,50.038 67.183,52.578 ; 67.183,50.038 67.183,52.578 ; 50.8,9.144 254.254,9.144 254.255,45.72 50.8,45.72 50.8,9.144

## Text inside footprints (layer, text, board x,y; h text height)
J1: Top Overlay "20" at 305.435,14.478 h1; Top Overlay "19" at 297.815,14.478 h1; Top Overlay "1" at 298.958,37.338 h1; Top Overlay "2" at 305.435,37.338 h1; Top Overlay "16" at 305.435,19.558 h1; Top Overlay "12" at 305.435,24.638 h1; Top Overlay "6" at 305.435,32.258 h1; Top Overlay "15" at 297.815,19.558 h1; Top Overlay "11" at 298.196,24.638 h1; Top Overlay "5" at 298.704,32.258 h1; Top Overlay "18" at 305.435,17.018 h1; Top Overlay "17" at 297.815,17.018 h1; Top Overlay "14" at 305.435,22.098 h1; Top Overlay "13" at 297.815,22.098 h1; Top Overlay "10" at 305.435,27.178 h1; Top Overlay "9" at 298.704,27.178 h1; Top Overlay "8" at 305.435,29.718 h1; Top Overlay "7" at 298.704,29.718 h1; Top Overlay "4" at 305.435,34.798 h1; Top Overlay "3" at 298.704,34.798 h1
J2: Top Overlay "20" at 294.005,16.764 h1 r90; Top Overlay "19" at 294.005,9.144 h1 r90; Top Overlay "1" at 271.145,10.287 h1 r90; Top Overlay "2" at 271.145,16.764 h1 r90; Top Overlay "16" at 288.925,16.764 h1 r90; Top Overlay "12" at 283.845,16.764 h1 r90; Top Overlay "6" at 276.225,16.764 h1 r90; Top Overlay "15" at 288.925,9.144 h1 r90; Top Overlay "11" at 283.845,9.525 h1 r90; Top Overlay "5" at 276.225,10.033 h1 r90; Top Overlay "18" at 291.465,16.764 h1 r90; Top Overlay "17" at 291.465,9.144 h1 r90; Top Overlay "14" at 286.385,16.764 h1 r90; Top Overlay "13" at 286.385,9.144 h1 r90; Top Overlay "10" at 281.305,16.764 h1 r90; Top Overlay "9" at 281.305,10.033 h1 r90; Top Overlay "8" at 278.765,16.764 h1 r90; Top Overlay "7" at 278.765,10.033 h1 r90; Top Overlay "4" at 273.685,16.764 h1 r90; Top Overlay "3" at 273.685,10.033 h1 r90
J3: Top Overlay "20" at 294.005,42.164 h1 r90; Top Overlay "19" at 294.005,34.544 h1 r90; Top Overlay "1" at 271.145,35.687 h1 r90; Top Overlay "2" at 271.145,42.164 h1 r90; Top Overlay "16" at 288.925,42.164 h1 r90; Top Overlay "12" at 283.845,42.164 h1 r90; Top Overlay "6" at 276.225,42.164 h1 r90; Top Overlay "15" at 288.925,34.544 h1 r90; Top Overlay "11" at 283.845,34.925 h1 r90; Top Overlay "5" at 276.225,35.433 h1 r90; Top Overlay "18" at 291.465,42.164 h1 r90; Top Overlay "17" at 291.465,34.544 h1 r90; Top Overlay "14" at 286.385,42.164 h1 r90; Top Overlay "13" at 286.385,34.544 h1 r90; Top Overlay "10" at 281.305,42.164 h1 r90; Top Overlay "9" at 281.305,35.433 h1 r90; Top Overlay "8" at 278.765,42.164 h1 r90; Top Overlay "7" at 278.765,35.433 h1 r90; Top Overlay "4" at 273.685,42.164 h1 r90; Top Overlay "3" at 273.685,35.433 h1 r90
J4: Top Overlay "3" at -1.016,34.798 h1; Top Overlay "4" at 5.715,34.798 h1; Top Overlay "7" at -1.016,29.718 h1; Top Overlay "8" at 5.715,29.718 h1; Top Overlay "9" at -1.016,27.178 h1; Top Overlay "10" at 5.715,27.178 h1; Top Overlay "13" at -1.905,22.098 h1; Top Overlay "14" at 5.715,22.098 h1; Top Overlay "17" at -1.905,17.018 h1; Top Overlay "18" at 5.715,17.018 h1; Top Overlay "5" at -1.016,32.258 h1; Top Overlay "11" at -1.524,24.638 h1; Top Overlay "15" at -1.905,19.558 h1; Top Overlay "6" at 5.715,32.258 h1; Top Overlay "12" at 5.715,24.638 h1; Top Overlay "16" at 5.715,19.558 h1; Top Overlay "2" at 5.715,37.338 h1; Top Overlay "1" at -0.762,37.338 h1; Top Overlay "19" at -1.905,14.478 h1; Top Overlay "20" at 5.715,14.478 h1
J5: Top Overlay "2" at 205.36,34.29 h1; Top Overlay "1" at 205.36,36.83 h1; Top Overlay "9" at 192.279,36.83 h1; Top Overlay "10" at 191.39,34.29 h1
JP2: Top Overlay "2" at 75.947,38.862 h1.27; Top Overlay "1" at 75.947,36.322 h1.27; Top Overlay "15" at 97.791,36.322 h1.27; Top Overlay "16" at 97.791,38.862 h1.27
U4: Top Overlay "1" at 40.089,34.167 h0.8 r90; Top Overlay "3" at 40.089,38.989 h0.8 r90; Top Overlay "2" at 40.132,36.449 h0.8 r90
U5: Top Overlay "1" at 40.216,17.022 h0.8 r90; Top Overlay "3" at 40.216,21.844 h0.8 r90; Top Overlay "2" at 40.259,19.304 h0.8 r90